# Altium PCB PCB1.PcbDoc
Units mm, origin at the board's own origin, x right, y up, seen from the top; angles counter-clockwise.
Board outline 100 x 85 mm, 2 copper layers (Top Layer, Bottom Layer); 63 components, 53 nets, 241 pads, 11 vias.
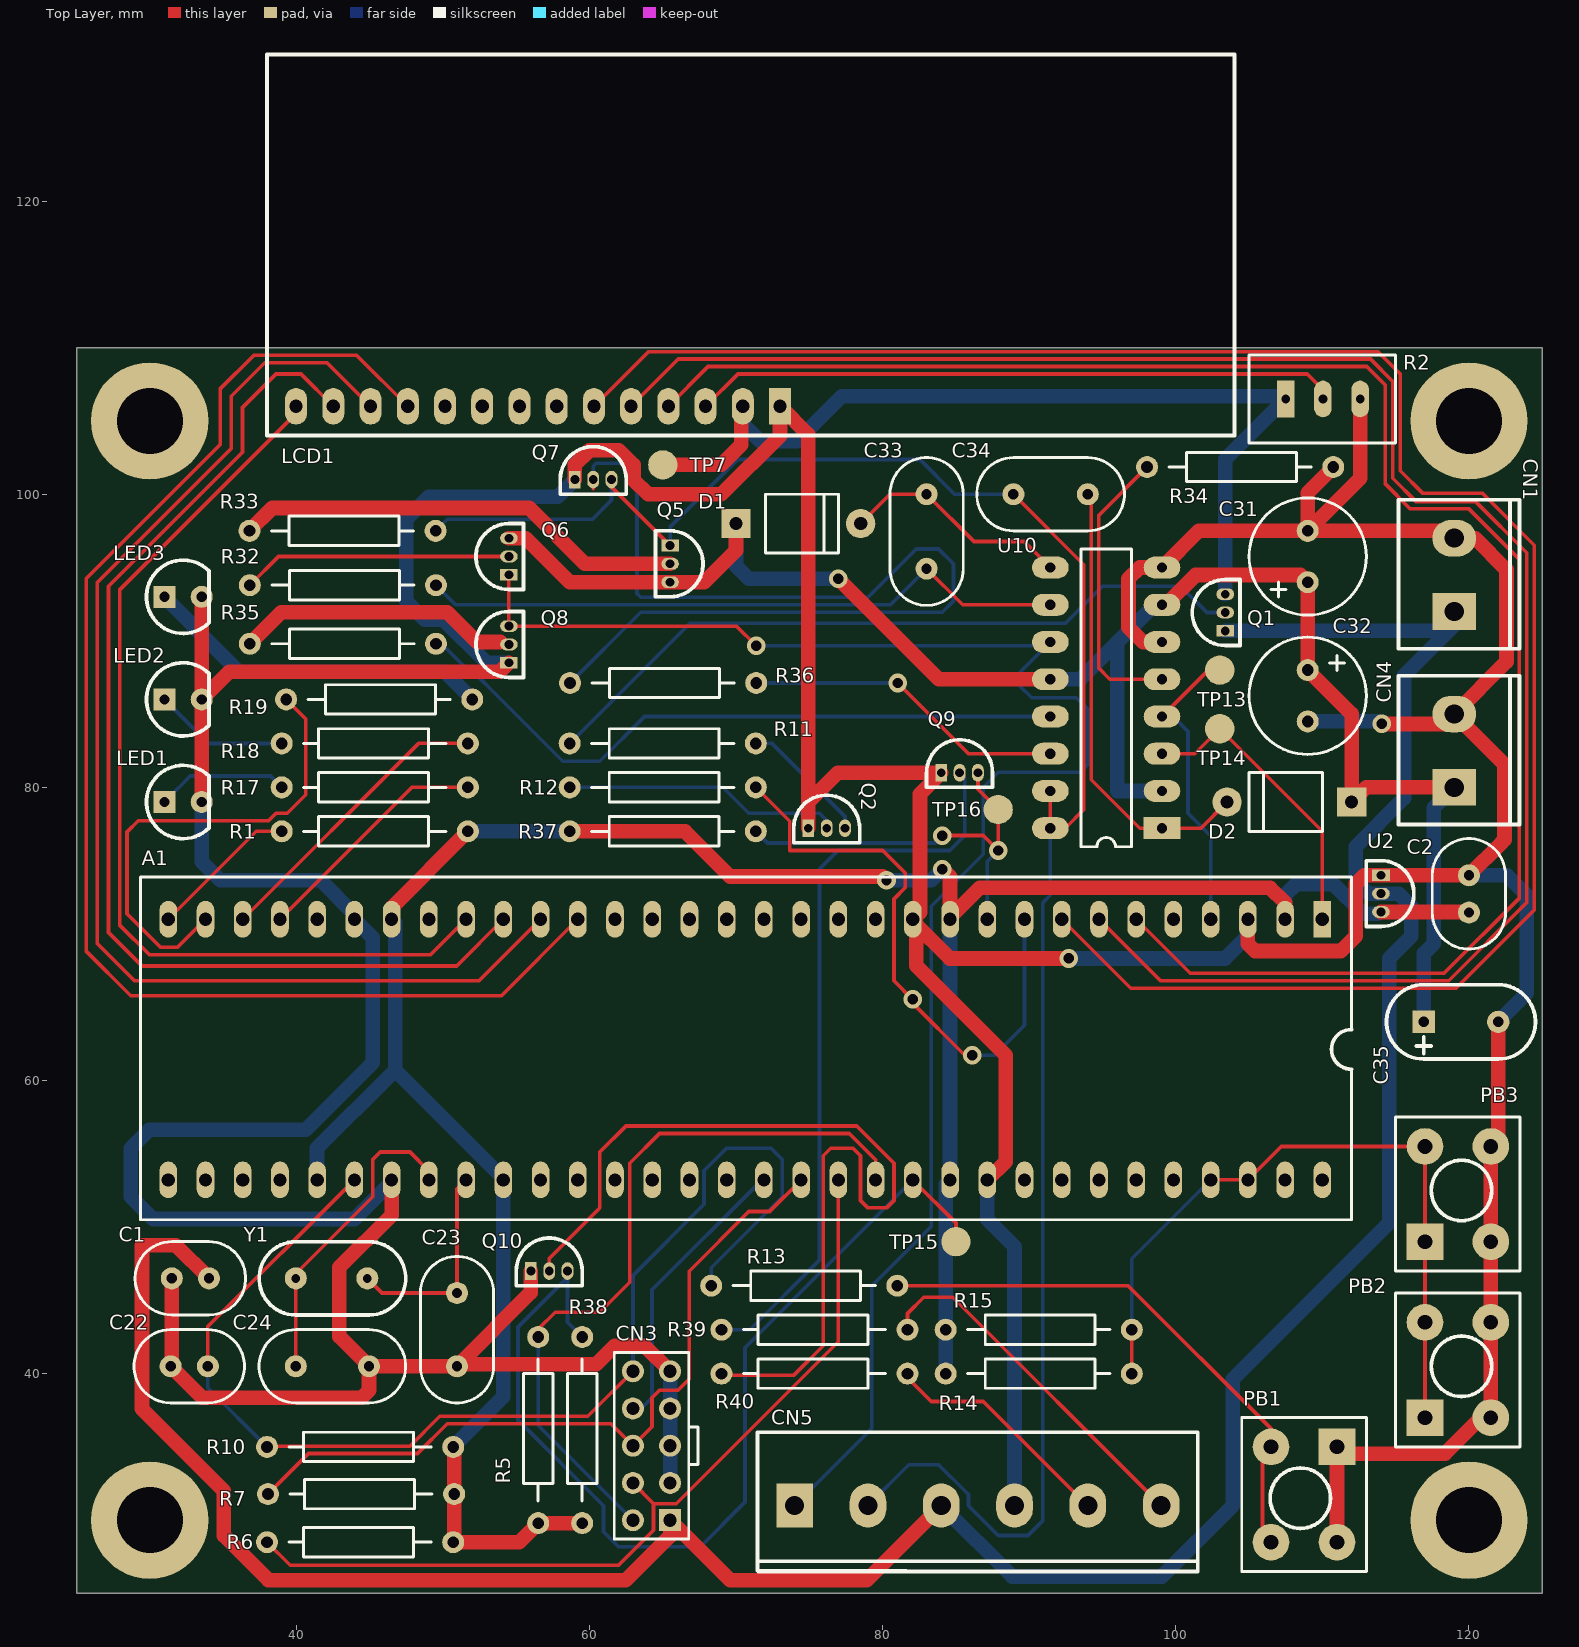
[diagram p0: Top Layer view]
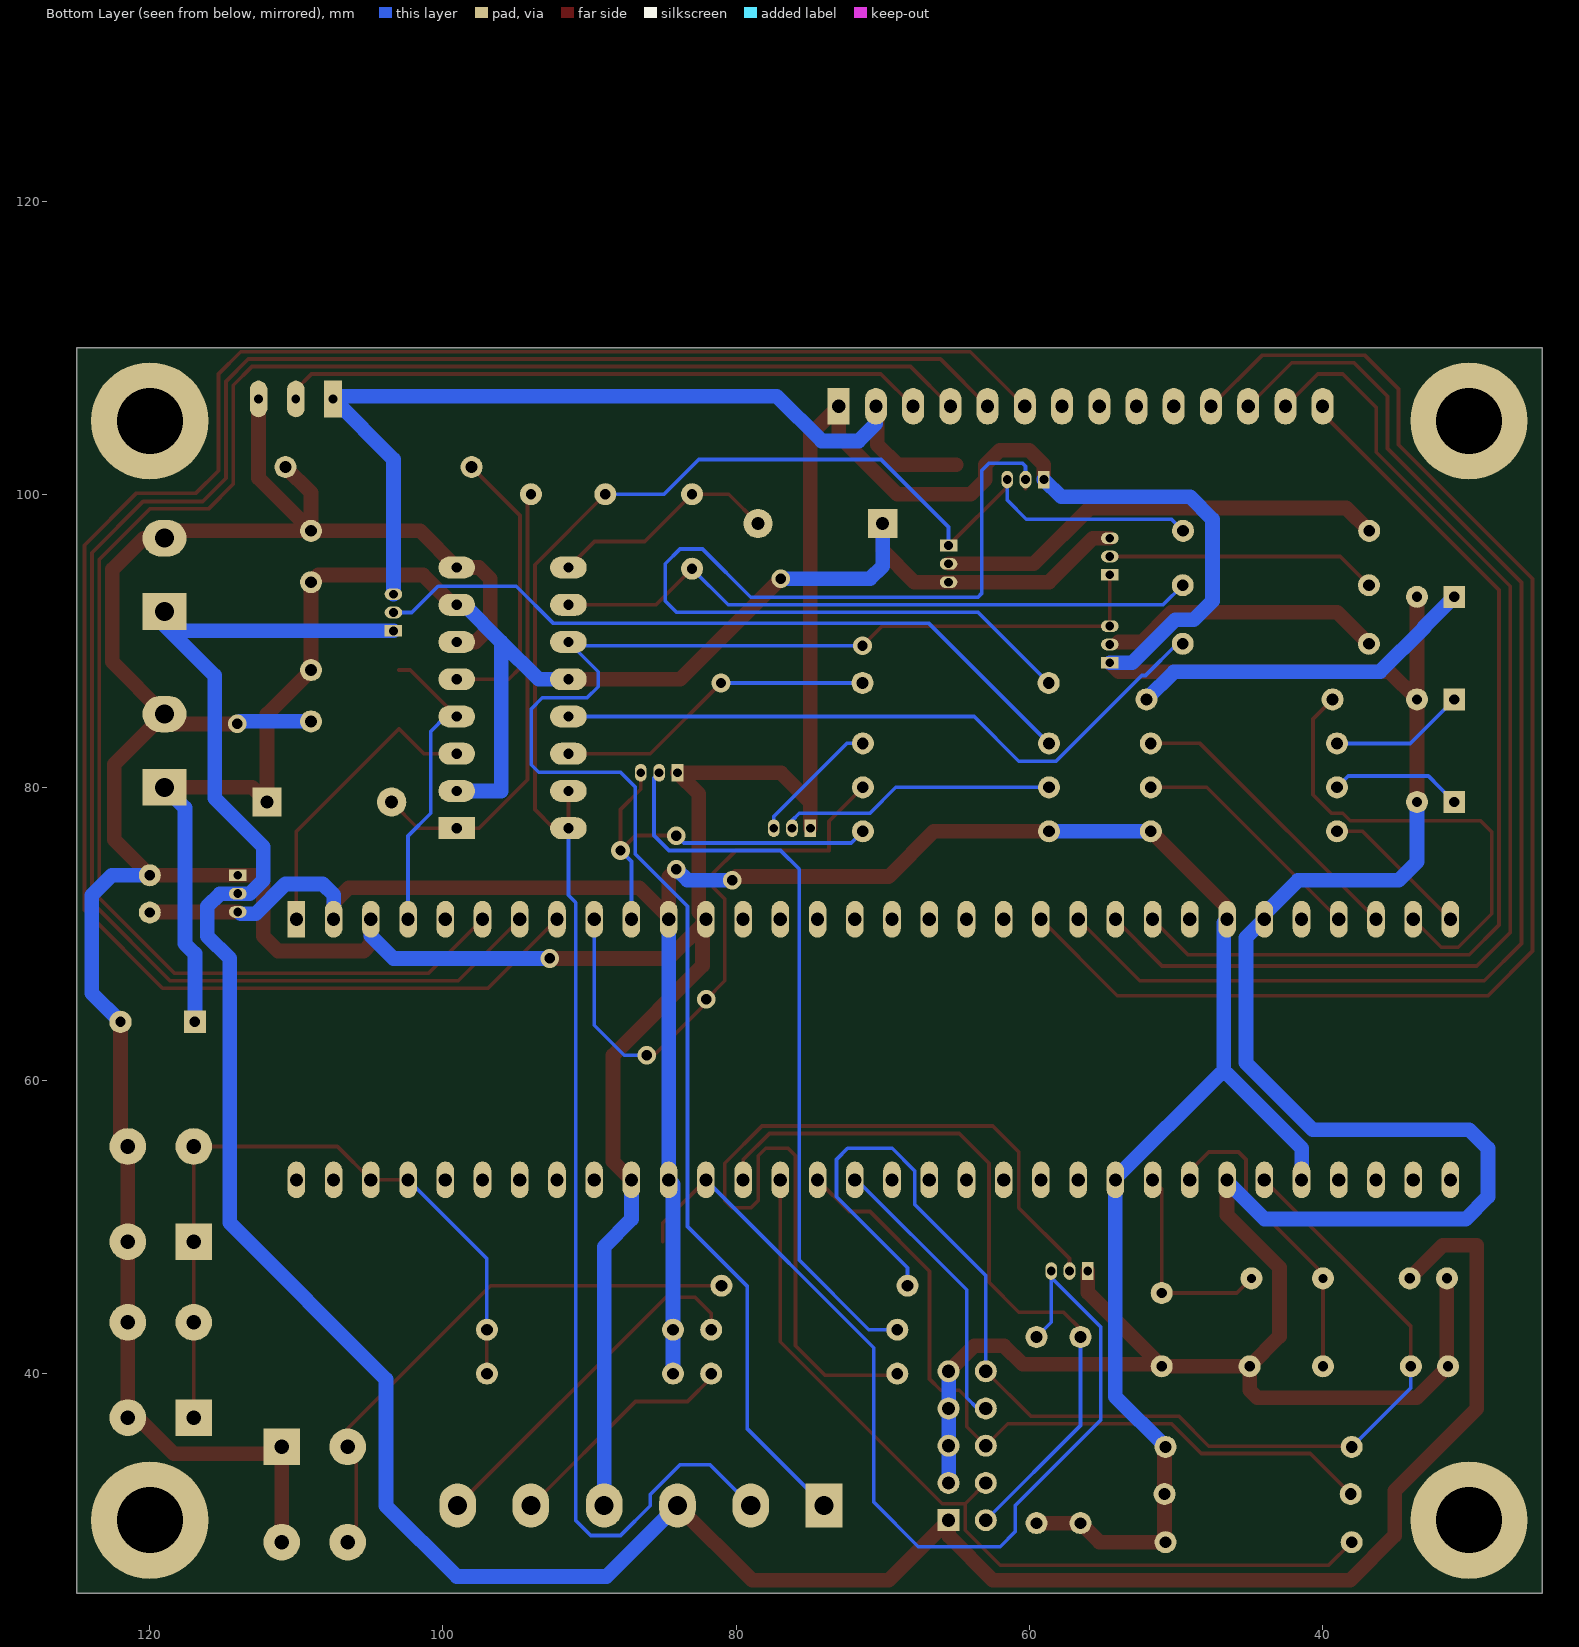
[diagram p1: Bottom Layer view, seen from below]

## Layer stack, top to bottom
Top Solder: solder mask 0.0102, Solder Resist, Dk 3.5
Top Layer: signal copper 0.0356
Dielectric 1: dielectric 0.32, FR-4, Dk 4.8
Bottom Layer: signal copper 0.0356
Bottom Solder: solder mask 0.0102, Solder Resist, Dk 3.5

## Board outline
25,25 25,110 125,110 125,25

## Design rules (kind name [scope] priority, off if disabled: settings)
Clearance [All] p1: gap=0.254 ignorepadtopadclearanceinfootprint=FALSE except(0: Arc-Hole Track-Hole SMDPad-Hole THPad-Hole Via-Hole Fill-Hole Poly-Hole Region-Hole Text-Hole)
PolygonConnect [All] p1: connectstyle=Relief reliefconductorwidth=0.254 reliefentries=4 polygonreliefangle="90 Angle" airgapwidth=0.254
RoomDefinition Sheet1 [InComponentClass('Sheet1')] p1: confinementstyle=ConfineIn formatcopy=TRUE lockcomponents=FALSE outline 24,19 128,19 128,112 24,112
RoomDefinition Sheet3 [InComponentClass('Sheet3')] p2: confinementstyle=ConfineIn formatcopy=TRUE lockcomponents=FALSE outline 21,22 126,22 126,114 21,114
RoutingVias [All] p1: holewidth=0.711 width=1.27 viastyle="Through Hole" minholewidth=0.711 minwidth=1.27 maxholewidth=0.711 maxwidth=1.27
SolderMaskExpansion [All] p1: expansion=0.102 istentingtop=FALSE
Width [All] p1 off: maxlimit=0.254 minlimit=0.254 preferedwidth=0.254
30 further rules are at their usual default settings.

## Components (designator, comment, footprint, x,y, rotation, side; value= is the part's Value field where it differs from the comment)
A1 "CC01800103" CC01800102 110,71 r270 top
C1 "0.1uF" C320C104M5R5TA 31.5,46.5 r0 top
C2 "0.1uF" C320C104M5R5TA 120,74 r270 top
C22 "0.1uF" C320C104M5R5TA 33.96,40.5 r180 top
C23 "22pF" K220J15C0GF5TH5 50.96,45.5 r270 top
C24 "22pF" K220J15C0GF5TH5 39.96,40.5 r0 top
C31 "330uF" ECA-1EM331 109,94 r90 top
C32 "330uF" ECA-1EM331 109,88 r270 top
C33 "0.22 uF" C330C224K1R5TA7301 83,100 r270 top
C34 "0.22 uF" C330C224K1R5TA7301 94,100 r180 top
C35 "1uF" SR215E105MAR 122,64 r180 top
CN1 "691137710002" 691137710002 119,92 r90 top
CN3 "HIF3FB-10DA-2.54DSA(71)" HIF3FB-10DA-2.54DSA(71) 65.5,30 r180 top
CN4 "691137710002" 691137710002 119,80 r90 top
CN5 "691137710006" 691137710006 74,31 r0 top
D1 "UF4002" UF4002 70,98 r0 top
D2 "UF4002" UF4002 112,79 r180 top
LCD1 "LCM-S01602DTR/M" LCM-S01602DTR/M 73,106 r0 top
LED1 "RED" C503B-RCN-CW0Z0AA1 31,79 r0 top
LED2 "RED" C503B-RCN-CW0Z0AA1 31,86 r0 top
LED3 "RED" C503B-RCN-CW0Z0AA1 31,93 r0 top
PB1 "3-1825910-5" 3-1825910-5 111,35 r270 top
PB2 "3-1825910-5" 3-1825910-5 117,37 r90 top
PB3 "3-1825910-5" 3-1825910-5 117,49 r90 top
Q1 "2N3906BU" 2N3906BU 103.378,90.678 r180 top value=PNP
Q2 "2N3904BU" 2N3904BU 74.93,77.216 r90 top value=NPN
Q5 "VN2210N3-G" VN2210N3-G 65.5,96.5 r0 top
Q6 "VN2210N3-G" VN2210N3-G 54.5,94.5 r180 top
Q7 "VN2210N3-G" VN2210N3-G 59,101 r90 top
Q8 "VN2210N3-G" VN2210N3-G 54.5,88.5 r180 top
Q9 "ZVNL120A" ZVNL120A 84,81 r90 top
Q10 "ZVNL120A" ZVNL120A 56,47 r90 top
R1 "1M" 1/2WattResistor 39,77 r0 top
R2 "10k" T93YA103KT20 107.5,106.5 r90 top
R5 "10k" 1/2WattResistor 56.5,42.5 r270 top
R6 "10k" 1/2WattResistor 38,28.5 r0 top
R7 "10k" 1/2WattResistor 38.064,31.782 r0 top
R10 "10k" 1/2WattResistor 38,35 r0 top
R11 "1.2k" 1/2WattResistor 71.348,83 r180 top
R12 "4.7k" 1/2WattResistor 71.348,80 r180 top
R13 "470" 1/2WattResistor 81,46 r180 top
R14 "10k" 1/2WattResistor 97,40 r180 top
R15 "10k" 1/2WattResistor 97,43 r180 top
R17 "1.2k" 1/2WattResistor 39,80 r0 top
R18 "1.2k" 1/2WattResistor 39,83 r0 top
R19 "1.2k" 1/2WattResistor 52,86 r180 top
R32 "10" 1/2WattResistor 49.524,93.796 r180 top
R33 "10" 1/2WattResistor 49.5,97.5 r180 top
R34 "15k" 1/2WattResistor 110.744,101.854 r180 top
R35 "10" 1/2WattResistor 49.524,89.796 r180 top
R36 "10" 1/2WattResistor 71.374,87.122 r180 top
R37 "4.7k" 1/2WattResistor 71.348,77 r180 top
R38 "4.7k" 1/2WattResistor 59.5,42.5 r270 top
R39 "4.7k" 1/2WattResistor 69,43 r0 top
R40 "4.7k" 1/2WattResistor 69,40 r0 top
TP7 "TESTPOINT-2MM" TESTPOINT-2MM 65,102 r0 top
TP13 "TESTPOINT-2MM" TESTPOINT-2MM 103,88 r0 top
TP14 "TESTPOINT-2MM" TESTPOINT-2MM 103,84 r0 top
TP15 "TESTPOINT-2MM" TESTPOINT-2MM 85,49 r0 top
TP16 "TESTPOINT-2MM" TESTPOINT-2MM 87.884,78.486 r0 top
U2 "MCP1700-3302E" MCP1700-3302E/TO 114,74 r0 top
U10 "HIP4082IPZ" HIP4082IPZ 99.06,77.216 r180 top
Y1 "16 MHz" ABL-16.000MHZ-B2 39.96,46.5 r0 top

## Footprints (in the part's own frame and the unit in brackets; to place one, negate y for a bottom-side part, rotate by r counter-clockwise, add the part's x,y. Pads: shape width x height; smd on the part's side, far side on the other; paste and mask are expansions set on the pad)
1/2WattResistor [mm]
  round 1.5 hole 0.8: 1(0,0) 2(12.7,0)
  silkscreen extent 1.5,-1 11.2,1
2N3904BU [mm]
  rect 1.2x0.8 hole 0.6: 1(0,0)
  oval 1.2x0.8 hole 0.6: 2(0,-1.25) 3(0,-2.5)
  silkscreen extent -1,-3.5 2.25,1
2N3906BU [mm]
  rect 1.2x0.8 hole 0.6: 1(0,0)
  oval 1.2x0.8 hole 0.6: 2(0,-1.25) 3(0,-2.5)
  silkscreen extent -1,-3.5 2.25,1
3-1825910-5 [mm]
  rect 2.5x2.5 hole 1: 1(0,0)
  round 2.5 hole 1: 1(6.5,0) 2(0,-4.5) 2(6.5,-4.5)
  silkscreen extent -2,-6.5 8.5,2
691137710002 [mm]
  rect 2.5x3 hole 1.3: 1(0,0)
  oval 2.5x3 hole 1.3: 2(5,0)
  silkscreen extent -2.54,-4.44 7.62,3.81
691137710006 [mm]
  rect 2.5x3 hole 1.3: 1(0,0)
  oval 2.5x3 hole 1.3: 2(5,0) 3(10,0) 4(15,0) 5(20,0) 6(25,0)
  silkscreen extent -2.54,-4.5 27.5,5
ABL-16.000MHZ-B2 [mm]
  round 1.5 hole 0.6: 1(0,0) 2(4.88,0)
  silkscreen extent -2.5,-2.5 7.5,2.5
C320C104M5R5TA [mm]
  round 1.5 hole 0.7: 1(0,0) 2(2.54,0)
  silkscreen extent -2.5,-2.5 5.04,2.5
C330C224K1R5TA7301 [mm]
  round 1.5 hole 0.7: 1(0,0) 2(5.08,0)
  silkscreen extent -2.5,-2.5 7.58,2.5
C503B-RCN-CW0Z0AA1 [mm]
  rect 1.5x1.5 hole 0.7: A(0,0)
  round 1.5 hole 0.7: K(2.54,0)
  silkscreen extent -1.23,-2.5 3.04,2.5
CC01800102 [mm]
  rect 2.5x1.2 hole 0.9: 1(0,0)
  oval 2.5x1.2 hole 0.9: 2(0,-2.54) 3(0,-5.08) 4(0,-7.62) 5(0,-10.16) 6(0,-12.7) 7(0,-15.24) 8(0,-17.78) 9(0,-20.32) 10(0,-22.86) 11(0,-25.4) 12(0,-27.94) 13(0,-30.48) 14(0,-33.02) 15(0,-35.56) 16(0,-38.1) 17(0,-40.64) 18(0,-43.18) 19(0,-45.72) 20(0,-48.26) 21(0,-50.8) 22(0,-53.34) 23(0,-55.88) 24(0,-58.42) 25(0,-60.96) 26(0,-63.5) 27(0,-66.04) 28(0,-68.58) 29(0,-71.12) 30(0,-73.66) 31(0,-76.2) 32(0,-78.74) 33(17.78,-78.74) 34(17.78,-76.2) 35(17.78,-73.66) 36(17.78,-71.12) 37(17.78,-68.58) 38(17.78,-66.04) 39(17.78,-63.5) 40(17.78,-60.96) 41(17.78,-58.42) 42(17.78,-55.88) 43(17.78,-53.34) 44(17.78,-50.8) 45(17.78,-48.26) 46(17.78,-45.72) 47(17.78,-43.18) 48(17.78,-40.64) 49(17.78,-38.1) 50(17.78,-35.56) 51(17.78,-33.02) 52(17.78,-30.48) 53(17.78,-27.94) 54(17.78,-25.4) 55(17.78,-22.86) 56(17.78,-20.32) 57(17.78,-17.78) 58(17.78,-15.24) 59(17.78,-12.7) 60(17.78,-10.16) 61(17.78,-7.62) 62(17.78,-5.08) 63(17.78,-2.54) 64(17.78,0)
  silkscreen extent -2.88,-80.65 20.5,2
ECA-1EM331 [mm]
  round 1.5 hole 0.8: 1(0,0) 2(3.5,0)
  silkscreen extent -2.25,-4 5.75,4
HIF3FB-10DA-2.54DSA(71) [mm]
  rect 1.5x1.5 hole 0.9: 1(0,0)
  round 1.5 hole 0.9: 2(2.54,0) 3(0,-2.54) 4(2.54,-2.54) 5(0,-5.08) 6(2.54,-5.08) 7(0,-7.62) 8(2.54,-7.62) 9(0,-10.16) 10(2.54,-10.16)
  silkscreen extent -1.9,-11.43 3.81,1.27
HIP4082IPZ [mm]
  rect 2.5x1.5 hole 0.7: 1(0,0)
  oval 2.5x1.5 hole 0.7: 2(0,-2.54) 3(0,-5.08) 4(0,-7.62) 5(0,-10.16) 6(0,-12.7) 7(0,-15.24) 8(0,-17.78) 9(7.62,-17.78) 10(7.62,-15.24) 11(7.62,-12.7) 12(7.62,-10.16) 13(7.62,-7.62) 14(7.62,-5.08) 15(7.62,-2.54) 16(7.62,0)
  silkscreen extent 2.08,-19.05 5.54,1.27
K220J15C0GF5TH5 [mm]
  round 1.5 hole 0.7: 1(0,0) 2(5,0)
  silkscreen extent -2.5,-2.5 7.5,2.5
LCM-S01602DTR/M [mm]
  rect 1.5x2.5 hole 0.9: 1(0,0)
  oval 1.5x2.5 hole 0.9: 2(-2.54,0) 3(-5.08,0) 4(-7.62,0) 5(-10.16,0) 6(-12.7,0) 7(-15.24,0) 8(-17.78,0) 9(-20.32,0) 10(-22.86,0) 11(-25.4,0) 12(-27.94,0) 13(-30.48,0) 14(-33.02,0)
  silkscreen extent -35,-2 31,24
MCP1700-3302E/TO [mm]
  rect 1.2x0.8 hole 0.6: 1(0,0)
  oval 1.2x0.8 hole 0.6: 2(0,-1.25) 3(0,-2.5)
  silkscreen extent -1,-3.5 2.25,1
SR215E105MAR [mil] "1 uF, 50 V Ceramic Capacitor"
  rect 60x60 hole 28: 1(200,0)
  round 60 hole 28: 2(0,0)
  silkscreen extent -100,-100 300,100
T93YA103KT20 [mm]
  rect 2.5x1.2 hole 0.6: 1(0,0)
  oval 2.5x1.2 hole 0.6: 2(0,-2.54) 3(0,-5.08)
  silkscreen extent -3,-7.5 3,2.5
TESTPOINT-2MM [mm]
  round 2 smd: 1(0,0)
UF4002 [mm]
  rect 2x2 hole 0.9: A(0,0)
  round 2 hole 0.9: K(8.5,0)
  silkscreen extent 2,-2 7,2
VN2210N3-G [mm]
  rect 1.2x0.8 hole 0.6: 1(0,0)
  oval 1.2x0.8 hole 0.6: 2(0,-1.25) 3(0,-2.5)
  silkscreen extent -1,-3.5 2.25,1
ZVNL120A [mm]
  rect 1.2x0.8 hole 0.6: 1(0,0)
  oval 1.2x0.8 hole 0.6: 2(0,-1.25) 3(0,-2.5)
  silkscreen extent -1,-3.5 2.25,1

## Part data
A1: "Tiva TM4C123GH6PM Microcontroller Module", Manufacturer="Confederation College", Microcontroller="TM4C123GH6PM Module", PartNumber=CC01800103
C1 C2 C22: library part C320C104M5R5TA, "0.1 uF, 50 V Ceramic Capacitor", Manufacturer=Kemet, PartNumber=C320C104M5R5TA
C23 C24: library part K220J15C0GF5TH5, "22 pF, 50 V Ceramic Capacitor", Manufacturer=Vishay, PartNumber=K220J15C0GF5TH5
C31 C32: library part ECA-1EM331, "330 uF, 25 V Aluminum Electrolytic Capacitor", Manufacturer="Panasonic Corporation of North America", PartNumber=ECA-1EM331
C33 C34: library part C330C224K1R5TA7301, "0.22 uF, 100 V Ceramic Capacitor", Manufacturer=Kemet, PartNumber=C330C224K1R5TA7301
C35: library part SR215E105MAR, "1 uF, 50 V Ceramic Capacitor", Manufacturer="AVX Corporation", PartNumber=SR215E105MAR
CN1 CN4: "TERM BLK 2POS SIDE ENTRY 5MM PCB", Manufacturer="Wurth Elektronk", PartNumber=691137710002
CN3: "CONN RCPT 10POS 0.1 GOLD PCB", Manufacturer="Hirose Electric Co, Ltd", PartNumber=HIF3FB-10DA-2.54DSA(71)
CN5: "TERM BLK 6POS SIDE ENTRY 5MM PCB", Manufacturer="Wurth Elektronik", PartNumber=691137710006
D1 D2: "Fast Rectifier", Manufacturer="ON Semiconductor", PartNumber=UF4002
LCD1: "16x2 Character LCD Module, TN, Reflective", Manufacturer="Lumex, Inc.", PartNumber=LCM-S01602DTR/M
LED1 LED2 LED3: library part C503B-RCN-CW0Z0AA1, "5 mm Red Round LED", Manufacturer="Cree, Inc.", PartNumber=C503B-RCN-CW0Z0AA1
PB1 PB2 PB3: "SWITCH TACTILE SPST-NO 0.05A 24V", Manufacturer="TE Connectivity ALCOSWITCH Switches", PartNumber=3-1825910-5
Q1: "PNP General Purpose Amplifier", Manufacturer="Fairchild Semiconductor Corporation", PartNumber=2N3906BU
Q2: "NPN General Purpose Amplifier", Manufacturer="Fairchild Semiconductor Corporation", PartNumber=2N3904BU
Q5 Q6 Q7 Q8: "N-Channel Enhancement-Mode Vertical DMOS FETs", Manufacturer="Supertex Inc.", PartNumber=VN2210N3-G
Q9 Q10: "25V, 31 A, N-Channel Power MOSFET", Manufacturer="Diodes Inc", PartNumber=ZVNL120A
R1: library part RES1M-500mW-THRU-HOLE, "1 Mega Ohm, ±5%, 0.5W Thru-Hole Resistor", Manufacturer=Generic, PartNumber=RES1k2-500mW-THRU-HOLE
R2: library part T93YA103KT20, "10 k, 21-Turn Trimmer", Manufacturer="Vishay Sfernice", PartNumber=T93YA103KT20
R5 R6 R7 R10 R14 R15: library part RES10k-500mW-THRU-HOLE, "10k, ±5%, 0.5W Thru-Hole Resistor", Manufacturer=Generic, PartNumber=RES10k-500mW-THRU-HOLE
R11 R17 R18 R19: library part RES1k2-500mW-THRU-HOLE, "1.2k, ±5%, 0.5W Thru-Hole Resistor", Manufacturer=Generic, PartNumber=RES1k2-500mW-THRU-HOLE
R12 R37 R38 R39 R40: library part RES4k7-500mW-THRU-HOLE, "4.7 kOhm, ±5%, 0.5W Thru-Hole Resistor", Manufacturer=Generic, PartNumber=RES4k7-500mW-THRU-HOLE
R13: library part RES470-500mW-THRU-HOLE, "470 Ohm, ±5%, 0.5W Thru-Hole Resistor", Manufacturer=Generic, PartNumber=RES470-500mW-THRU-HOLE
R32 R33 R35 R36: library part RES10-500mW-THRU-HOLE, "10 Ohmn, ±5%, 0.5W Thru-Hole Resistor", Manufacturer=Generic, PartNumber=RES10-500mW-THRU-HOLE
R34: library part RES15k-500mW-THRU-HOLE, "15 kOhm, ±5%, 0.5W Thru-Hole Resistor", Manufacturer=Generic, PartNumber=RES15k-500mW-THRU-HOLE
TP7 TP13 TP14 TP15 TP16: "Test Point 2MM diameter", Manufacturer=-, PartNumber=-
U2: "Low Quiescent Current LDO", Manufacturer="Microchip Technology", PartNumber=MCP1700-3302E
U10: "80V, 1.25A Peak Current H-Bridge FET Driver", Manufacturer=Renesas, PartNumber=HIP4082IPZ
Y1: library part ABL-16.000MHZ-B2, "16 MHz AC/49US (AT49) Microprocessor Crystall", Manufacturer="Abracon Corporation", PartNumber=ABL-16.000MHZ-B2

## Free pads (board coordinates)
  round 8 hole 4.5: 0(30,30) 0(30,105) 0(120,30) 0(120,105)

## Via types
v1: diameter 1.27, hole 0.711, Top Layer to Bottom Layer, tented both sides, 11 vias

## Nets (pads, with @x,y where several pads share a name; then routed paths per layer and width w, separated by ;. In a path a pad name is that pad's centre, name@x,y a point inside that pad or via, vN(x,y) a via of type N, cw(c..) or ccw(c..) an arc to the next point about the centre after c; other vN are vias at no path point)
+3.3V: A1.2 A1.11 A1.26 A1.37 A1.42 A1.54 C2.2 R1.2 R5.2 R6.2 R7.2 R10.2 R14.2 R15.2 R37.2 R38.2 U2.3 | length 183.6
  Top Layer w1: A1.26 46.5,71.8 R1.2 ; R10.2 50.764,34.936 R7.2 50.764,28.564 R6.2 55.2,28.5 R5.2 R38.2 ; R37.2 66.51,77 69.596,73.914 80.01,73.914 v1(80.264,73.66) ; v1(84.074,74.422) 84.6,73.896 A1.11@84.6,71.138 ; A1.11 A1.11@84.6,71.138 ; A1.2 107.46,72.118 106.426,73.152 86.614,73.152 A1.11@84.6,71.138 ; U2.3 119.96,71.5 C2.2
  Bottom Layer w1: A1.37 41.402,53.238 41.402,55.372 46.5,60.47 46.972,60.47 54.12,53.322 A1.42 54.12,38.42 R10.2 ; A1.26 46.736,70.764 46.736,60.47 ; R1.2 R37.2 ; v1(80.264,73.66) 83.312,73.66 v1(84.074,74.422) ; R14.2 R15.2 84.3,52.92 A1.54 A1.11 ; A1.2 107.46,72.662 108.204,73.406 110.744,73.406 112.776,71.374 U2.3@113.792,71.374
+5V: C1.2 CN1.1 CN3.1 CN5.3 Q1.1 U2.2 | length 195.7
  Top Layer w1: C1.2 31.772,48.768 29.464,48.768 29.464,37.592 35.052,32.004 35.052,28.956 38.1,25.908 62.484,25.908 65.5,28.924 CN3.1 69.592,25.908 78.908,25.908 CN5.3
  Bottom Layer w1: CN5.3 88.838,26.162 99.06,26.162 103.886,30.988 103.886,39.624 114.554,50.292 114.554,68.326 116.078,69.85 116.078,71.882 115.21,72.75 U2.2 113.178,72.75 112.268,73.66 112.268,75.946 115.57,79.248 115.57,87.63 119,91.06 CN1.1 117.678,90.678 Q1.1
+5VP: LCD1.2 Q1.3 R2.1 TP7.1 | length 63.7
  Top Layer w1: TP7.1 68.98,102 70.358,103.378 70.358,105.898 LCD1.2
  Bottom Layer w1: LCD1.2 70.46,104.8 71.628,103.632 74.168,103.632 77.216,106.68 107.32,106.68 R2.1 103.378,102.378 Q1.3
+12V: C31.1 C32.1 C35.1 CN4.1 D1.A D2.A Q5.3 Q6.3 U10.2 U10.7 U10.12 | length 121.5
  Top Layer w1: Q6.3 55.654,97 58.654,94 Q5.3 66,94 67.838,94 70,96.162 D1.A ; v1(76.962,94.234) 83.82,87.376 U10.12 ; U10.7 99.314,92.456 101.346,94.488 108.512,94.488 C31.1 C32.1 112,85 D2.A 113,80 CN4.1
  Bottom Layer w1: D1.A 70,95.1 70.866,94.234 v1(76.962,94.234) ; U10.12 93.472,87.376 96.012,89.916 ; U10.2 96.012,79.756 96.012,89.916 ; U10.7 98.552,92.456 96.012,89.916 ; C35.1 116.92,68.66 117.602,69.342 117.602,78.602 CN4.1
CONTRAST: LCD1.3 R2.2 | length 44.1
  Top Layer w0.25: LCD1.3 70.124,108.204 108.966,108.204 110.04,107.13 R2.2
GND: A1.3 A1.12 A1.27 A1.39 A1.55 C1.1 C2.1 C22.2 C23.2 C24.2 C31.2 C32.2 C35.2 CN1.2 CN3.3 CN3.5 CN3.7 CN3.9 CN4.2 CN5.4 LCD1.1 LED1.K LED2.K LED3.K PB1.1 PB2.2 PB3.2 Q2.1 Q7.1 Q8.1 Q9.1 Q10.1 R2.3 R34.1 U2.1 U10.6 U10.8 | length 513.5
  Top Layer w1: C1.1 31.5,40.58 C22.2 33.566,38.354 44.45,38.354 44.96,38.864 C24.2 ; LED1.K LED2.K ; LED3.K LED2.K ; A1.27 A1.27@43.96,71.646 ; A1.39 46.5,50.818 42.926,47.244 42.926,42.534 C24.2 ; Q8.1 53.884,87.884 35.424,87.884 LED2.K ; Q10.1 56,45.54 C23.2@51.1,40.64 ; Q7.1 59,102 60,103 62,103 63,102 63,101 64,100 69,100 73,104 LCD1.1 74.93,104.07 74.93,78.994 ; CN3.9 63.75,41.91 61.722,41.91 60.452,40.64 C23.2@51.1,40.64 ; Q2.1 74.93,78.994 ; A1.12@82.06,70.848 84.582,68.326 v1(92.71,68.326) ; A1.55 88.392,54.472 88.392,61.722 82.296,67.818 82.296,70.764 A1.12 82.55,71.49 82.55,79.55 Q9.1 76.936,81 74.93,78.994 ; U10.6 97.79,89.916 96.774,90.932 96.774,94.234 97.536,94.996 U10.8 101.564,97.5 C31.2 ; A1.3 104.92,69.324 105.41,68.834 111.252,68.834 112.268,69.85 112.268,73.406 112.862,74 U2.1 C2.1 122.2,76.2 122.428,76.428 122.428,81.572 CN4.2 ; R34.1 109,100.11 C31.2 ; PB1.1@111,28.5 111,34.544 111,35 111.456,34.544 118.364,34.544 120.82,37 121.5,37 121.5,43.5 121.5,49 121.5,55.5 122,56 C35.2 ; R2.3 112.58,101.08 C31.2 ; v1(114.046,84.328) 118.328,84.328 CN4.2 ; C24.2 C23.2 C23.2@51.1,40.64 ; C31.2 118.5,97.5 CN1.2 120.424,97 122.563,94.861 122.563,88.563 CN4.2
  Bottom Layer w1: LED1.K 33.54,74.918 34.798,73.66 41.656,73.66 43.96,71.356 A1.27 45.212,69.748 45.212,61.214 40.64,56.642 29.972,56.642 28.702,55.372 28.702,52.07 30.226,50.546 43.942,50.546 46.5,53.104 A1.39 ; Q8.1 52.978,88.5 50.038,91.44 48.768,91.44 47.498,92.71 47.498,98.298 49.022,99.822 57.822,99.822 Q7.1 ; CN3.3 CN3.5 CN3.7 CN3.9 ; A1.55 87.14,50.528 89,48.668 CN5.4 ; v1(92.71,68.326) 103.378,68.326 104.92,69.868 A1.3 ; C32.2 113.874,84.5 v1(114.046,84.328) ; C2.1 122.596,74 123.952,72.644 123.952,65.952 C35.2
MAL: A1.4 TP13.1 U10.4 | length 20.9
  Top Layer w0.254: U10.4 102.224,88 TP13.1
  Bottom Layer w0.254: U10.4 99.822,84.836 100.838,83.82 100.838,78.232 102.38,76.69 A1.4
MBL: A1.1 TP14.1 U10.3 | length 20.5
  Top Layer w0.254: U10.3 101.296,82.296 TP14.1 110,77 A1.1
MOTOR+: CN5.1 Q6.1 Q8.3 U10.11 | length 115.7
  Top Layer w0.25: Q6.1 Q8.3 70.036,91 v1(71.374,89.662)
  Bottom Layer w0.25: v1(71.374,89.662) U10.11@91.186,89.662 ; CN5.1 79.248,36.248 79.248,45.974 83.312,50.038 83.312,71.882 86.868,75.438 86.868,80.01 87.884,81.026 93.472,81.026 93.98,81.534 93.98,85.344 93.218,86.106 90.17,86.106 89.408,86.868 89.408,87.884 U10.11@91.186,89.662 ; U10.11 U10.11@91.186,89.662
MOTOR-: C34.2 CN5.2 Q5.1 Q7.3 R33.1 U10.15 U10.16 | length 140.3
  Top Layer w0.254: Q7.3 61.5,100.5 Q5.1 ; C34.2 93.726,95.194 93.726,78.486 92.456,77.216 U10.16 U10.15
  Bottom Layer w0.254: R33.1 50.298,98.298 60.198,98.298 61.5,99.6 Q7.3 ; Q5.1 65.5,97.758 70.104,102.362 82.55,102.362 84.912,100 C34.2 ; CN5.2 81.782,33.782 83.82,33.782 85.631,31.971 85.852,31.75 85.852,30.988 87.884,28.956 89.916,28.956 90.932,29.972 90.932,72.136 91.44,72.644 U10.16
NetA1_6: A1.6 LCD1.4 | length 121.5
  Top Layer w0.254: LCD1.4 68.092,108.712 113.03,108.712 114.3,107.442 114.3,100.7 116,99 120,99 123.444,95.556 123.444,72.444 118.31,67.31 100.99,67.31 A1.6
NetA1_7: A1.7 LCD1.5 | length 128.8
  Top Layer w0.254: LCD1.5 66.06,109.22 113.284,109.22 114.808,107.696 114.808,101.092 116.392,99.508 120.456,99.508 123.952,96.012 123.952,72.136 118.618,66.802 98.958,66.802 A1.7
NetA1_8: A1.8 LCD1.6 | length 136.3
  Top Layer w0.254: LCD1.6 64.028,109.728 113.792,109.728 115.316,108.204 115.316,101.6 116.84,100.076 120.904,100.076 124.46,96.52 124.46,71.628 119.126,66.294 96.926,66.294 A1.8
NetA1_9: A1.9 R12.1 | length 40.7
  Top Layer w0.254: R12.1 73.66,77.688 73.66,75.692 80.01,75.692 81.534,74.168 81.534,73.152 80.772,72.39 80.772,66.802 v1(82.042,65.532) 82.042,65.278 85.598,61.722 v1(86.106,61.722)
  Bottom Layer w0.254: v1(86.106,61.722) 87.63,61.722 89.68,63.772 A1.9
NetA1_21: A1.21 LCD1.11 | length 94.3
  Top Layer w0.254: LCD1.11 44.126,109.474 37.084,109.474 34.798,107.188 34.798,103.378 25.654,94.234 25.654,68.834 28.702,65.786 53.986,65.786 A1.21
NetA1_22: A1.22 LCD1.12 | length 85.8
  Top Layer w0.254: LCD1.12 42.094,108.966 37.846,108.966 35.56,106.68 35.56,103.124 26.416,93.98 26.416,69.342 28.956,66.802 52.462,66.802 A1.22
NetA1_23: A1.23 LCD1.13 | length 76.9
  Top Layer w0.254: LCD1.13 40.316,108.204 38.608,108.204 36.322,105.918 36.322,102.87 27.178,93.726 27.178,70.104 29.464,67.818 50.938,67.818 A1.23
NetA1_24: A1.24 LCD1.14 | length 65.9
  Top Layer w0.254: LCD1.14 39.98,105.512 27.94,93.472 27.94,70.612 29.972,68.58 49.16,68.58 A1.24
NetA1_29: A1.29 R17.2 | length 16.5
  Top Layer w0.254: A1.29 47.88,80 R17.2
NetA1_30: A1.30 R18.2 | length 20.3
  Top Layer w0.25: A1.30 48.34,83 R18.2
NetA1_31: A1.31 R19.2 | length 33
  Top Layer w0.25: A1.31 31.888,69.088 30.734,69.088 28.448,71.374 28.448,76.962 29.21,77.724 38.1,77.724 38.608,78.232 39.37,78.232 40.64,79.502 40.64,84.66 R19.2
NetA1_32: A1.32 R1.1 | length 10.2
  Top Layer w0.25: A1.32 37.26,77 R1.1
NetA1_40: A1.40 C24.1 Y1.1 | length 21.5
  Top Layer w0.254: C24.1 Y1.1 39.96,46.818 45.212,52.07 45.212,54.61 45.72,55.118 47.752,55.118 49.022,53.848 49.022,53.238 A1.40
NetA1_41: A1.41 C23.1 Y1.2 | length 14.5
  Top Layer w0.254: Y1.2 45.84,45.5 C23.1 50.96,52.6 A1.41
NetA1_61: A1.61 A1.62 PB2.1 PB3.1 R14.1 R15.1 | length 49.5
  Top Layer w0.25: R14.1 R15.1 ; A1.61 A1.62 107.2,55.5 117,55.5 117,49 117,43.5 PB2.1@117,37
  Bottom Layer w0.25: R15.1 97,47.84 A1.61
NetC33_1: C33.1 D1.K U10.9 | length 15.8
  Top Layer w0.25: D1.K 80.5,100 C33.1 86.226,96.774 89.662,96.774 U10.9
NetC33_2: C33.2 R32.1 U10.10 | length 44.5
  Top Layer w0.25: C33.2 85.464,92.456 U10.10
  Bottom Layer w0.25: R32.1 50.864,92.456 80.536,92.456 C33.2
NetC34_1: C34.1 D2.K U10.1 | length 31
  Top Layer w0.254: C34.1 94.234,99.766 94.234,80.518 97.536,77.216 U10.1 101.716,77.216 D2.K
NetCN5_5: CN5.5 R40.2 | length 16.2
  Top Layer w0.25: R40.2 81.7,39.712 83.312,38.1 86.868,38.1 93.98,30.988 93.988,30.988 CN5.5
NetCN5_6: CN5.6 R39.2 | length 24.8
  Top Layer w0.25: R39.2 81.7,44.108 82.804,45.212 84.788,45.212 CN5.6
NetLED1_A: LED1.A R17.1 | length 9.1
  Bottom Layer w0.254: LED1.A 32,80 32.014,80 32.004,80.01 32.766,80.772 38.228,80.772 R17.1
NetLED2_A: LED2.A R18.1 | length 9.2
  Bottom Layer w0.254: LED2.A 34,83 R18.1
NetLED3_A: LED3.A R19.1 | length 24
  Bottom Layer w1: LED3.A 33.068,90.932 33.02,90.932 36.068,87.884 50.116,87.884 R19.1
NetPB1_2: PB1.2 R13.1 | length 37.8
  Top Layer w0.25: R13.1 95.276,46 96.748,46 106.5,36.248 106.5,35 105.918,34.418 105.918,29.082 PB1.2@106.5,28.5
NetQ1_2: Q1.2 R11.2 | length 49.9
  Bottom Layer w0.25: R11.2 66.834,91.186 92.456,91.186 94.996,93.726 100.33,93.726 102.128,91.928 Q1.2
NetQ2_2: Q2.2 R12.2 | length 19
  Bottom Layer w0.25: R12.2 69.098,80 70.866,78.232 75.692,78.232 76.18,77.744 Q2.2
NetQ2_3: Q2.3 R11.1 | length 8.9
  Bottom Layer w0.25: R11.1 72.448,83 77.43,78.018 Q2.3
NetQ5_2: Q5.2 R33.2 | length 30.9
  Top Layer w1: R33.2 38.36,99.06 55.88,99.06 59.686,95.254 Q5.2@65.496,95.254
NetQ6_2: Q6.2 R32.2 | length 18.5
  Top Layer w0.25: R32.2 38.778,95.75 Q6.2
NetQ7_2: Q7.2 R36.2 | length 67.7
  Top Layer w0.254: 60.25,100.382 Q7.2
  Bottom Layer w0.254: R36.2 63.5,91.948 84.074,91.948 84.836,92.71 84.836,95.25 83.82,96.266 82.296,96.266 78.994,92.964 63.5,92.964 63.246,93.218 63.246,101.6 62.738,102.108 60.452,102.108 60.25,101.906 Q7.2
NetQ8_2: Q8.2 R35.2 | length 18.8
  Top Layer w1: R35.2 38.976,91.948 50.292,91.948 52.324,89.916 53.904,89.916
NetQ9_2: Q9.2 R39.1 | length 50.6
  Bottom Layer w0.25: R39.1 70.94,43 75.692,47.752 75.692,74.422 76.962,75.692 84.582,75.692 85.598,76.708 85.598,80.652 Q9.2
NetQ10_2: Q10.2 R40.1 | length 63.5
  Top Layer w0.25: Q10.2 57.25,47.852 60.706,51.308 60.706,55.118 62.484,56.896 78.232,56.896 80.772,54.356 80.772,51.816 80.264,51.308 78.994,51.308 78.486,51.816 78.486,54.864 77.978,55.372 76.454,55.372 75.946,54.864 75.946,41.91 73.914,39.878 69.122,39.878 R40.1
NetR34_2: R34.2 U10.5 | length 20.2
  Top Layer w0.25: R34.2 94.742,98.552 94.742,94.234 94.74,94.232 94.74,88.14 95.504,87.376 U10.5 U10.5@99.568,87.376
NetR35_1: R35.1 U10.13 | length 46.5
  Bottom Layer w0.25: R35.1 49.904,89.796 52.07,87.63 52.324,87.63 53.594,86.36 58.166,81.788 60.706,81.788 63.754,84.836 U10.13
NetR36_1: R36.1 U10.14 | length 22.1
  Top Layer w0.25: v1(81.026,87.122) 85.852,82.296 U10.14
  Bottom Layer w0.25: R36.1 v1(81.026,87.122)
PhA: A1.53 Q10.3 R38.1 TP15.1 | length 69.6
  Top Layer w0.254: A1.53 85,50.28 TP15.1
  Bottom Layer w0.254: Q10.3 Q10.3@58.5,46.562 ; R38.1 58.5,43.5 Q10.3@58.5,46.562 ; A1.53 70.612,41.772 70.612,31.242 67.564,28.194 61.976,28.194 60.96,29.21 60.96,30.988 55.118,36.83 55.118,43.18 Q10.3@58.5,46.562
PhB: A1.10 Q9.3 R37.1 TP16.1 | length 28.4
  Top Layer w0.254: v1(84.074,76.708) 86.868,76.708 v1(87.884,75.692) TP16.1 86.5,79.87 Q9.3
  Bottom Layer w0.254: R37.1 72.148,76.2 83.566,76.2 v1(84.074,76.708) ; A1.10 87.14,74.948 v1(87.884,75.692)
R\E\S\E\T\: A1.38 C22.1 CN3.10 R10.1 R13.2 | length 83.7
  Top Layer w0.254: C22.1 33.96,43.22 A1.38 ; R10.1 38.052,35.052 47.752,35.052 49.784,37.084 59.884,37.084 CN3.10
  Bottom Layer w0.254: C22.1 33.96,39.04 R10.1 ; CN3.10 62.96,46.704 67.818,51.562 67.818,53.848 69.342,55.372 72.39,55.372 73.152,54.61 73.152,52.07 68.3,47.218 R13.2
TCK: A1.52 CN3.2 R5.1 | length 51.1
  Top Layer w0.25: R5.1 56.5,43.038 57.658,44.196 60.706,44.196 62.738,46.228 62.738,54.356 64.77,56.388 77.724,56.388 79.52,54.592 A1.52
  Bottom Layer w0.25: R5.1 56.5,36.46 CN3.2
TDI: A1.50 CN3.6 R7.1 | length 52
  Top Layer w0.254: R7.1 40.826,34.544 48.26,34.544 50.292,36.576 61.464,36.576 CN3.6 64.262,36.382 64.262,38.354 64.77,38.862 66.04,38.862 66.802,39.624 66.802,46.99 70.866,51.054 72.274,51.054 A1.50
TDO: A1.49 CN3.8 | length 19.7
  Bottom Layer w0.254: CN3.8 63.528,37.62 64.262,38.354 64.262,45.72 71.762,53.22 A1.49
TMS: A1.51 CN3.4 R6.1 | length 60
  Top Layer w0.25: R6.1 39.576,26.924 61.976,26.924 64.371,29.319 64.371,31.129 ; CN3.4 64.371,31.129 ; A1.51 76.98,42.182 65.927,31.129 64.371,31.129
pads on no net: A1.5 A1.13 A1.14 A1.15 A1.16 A1.17 A1.18 A1.19 A1.20 A1.25 A1.28 A1.33 A1.34 A1.35 A1.36 A1.43 A1.44 A1.45 A1.46 A1.47 A1.48 A1.56 A1.57 A1.58 A1.59 A1.60 A1.63 A1.64 LCD1.7 LCD1.8 LCD1.9 LCD1.10